# EAGLE board diplexer_v4rev0-layout (EAGLE 6.1)
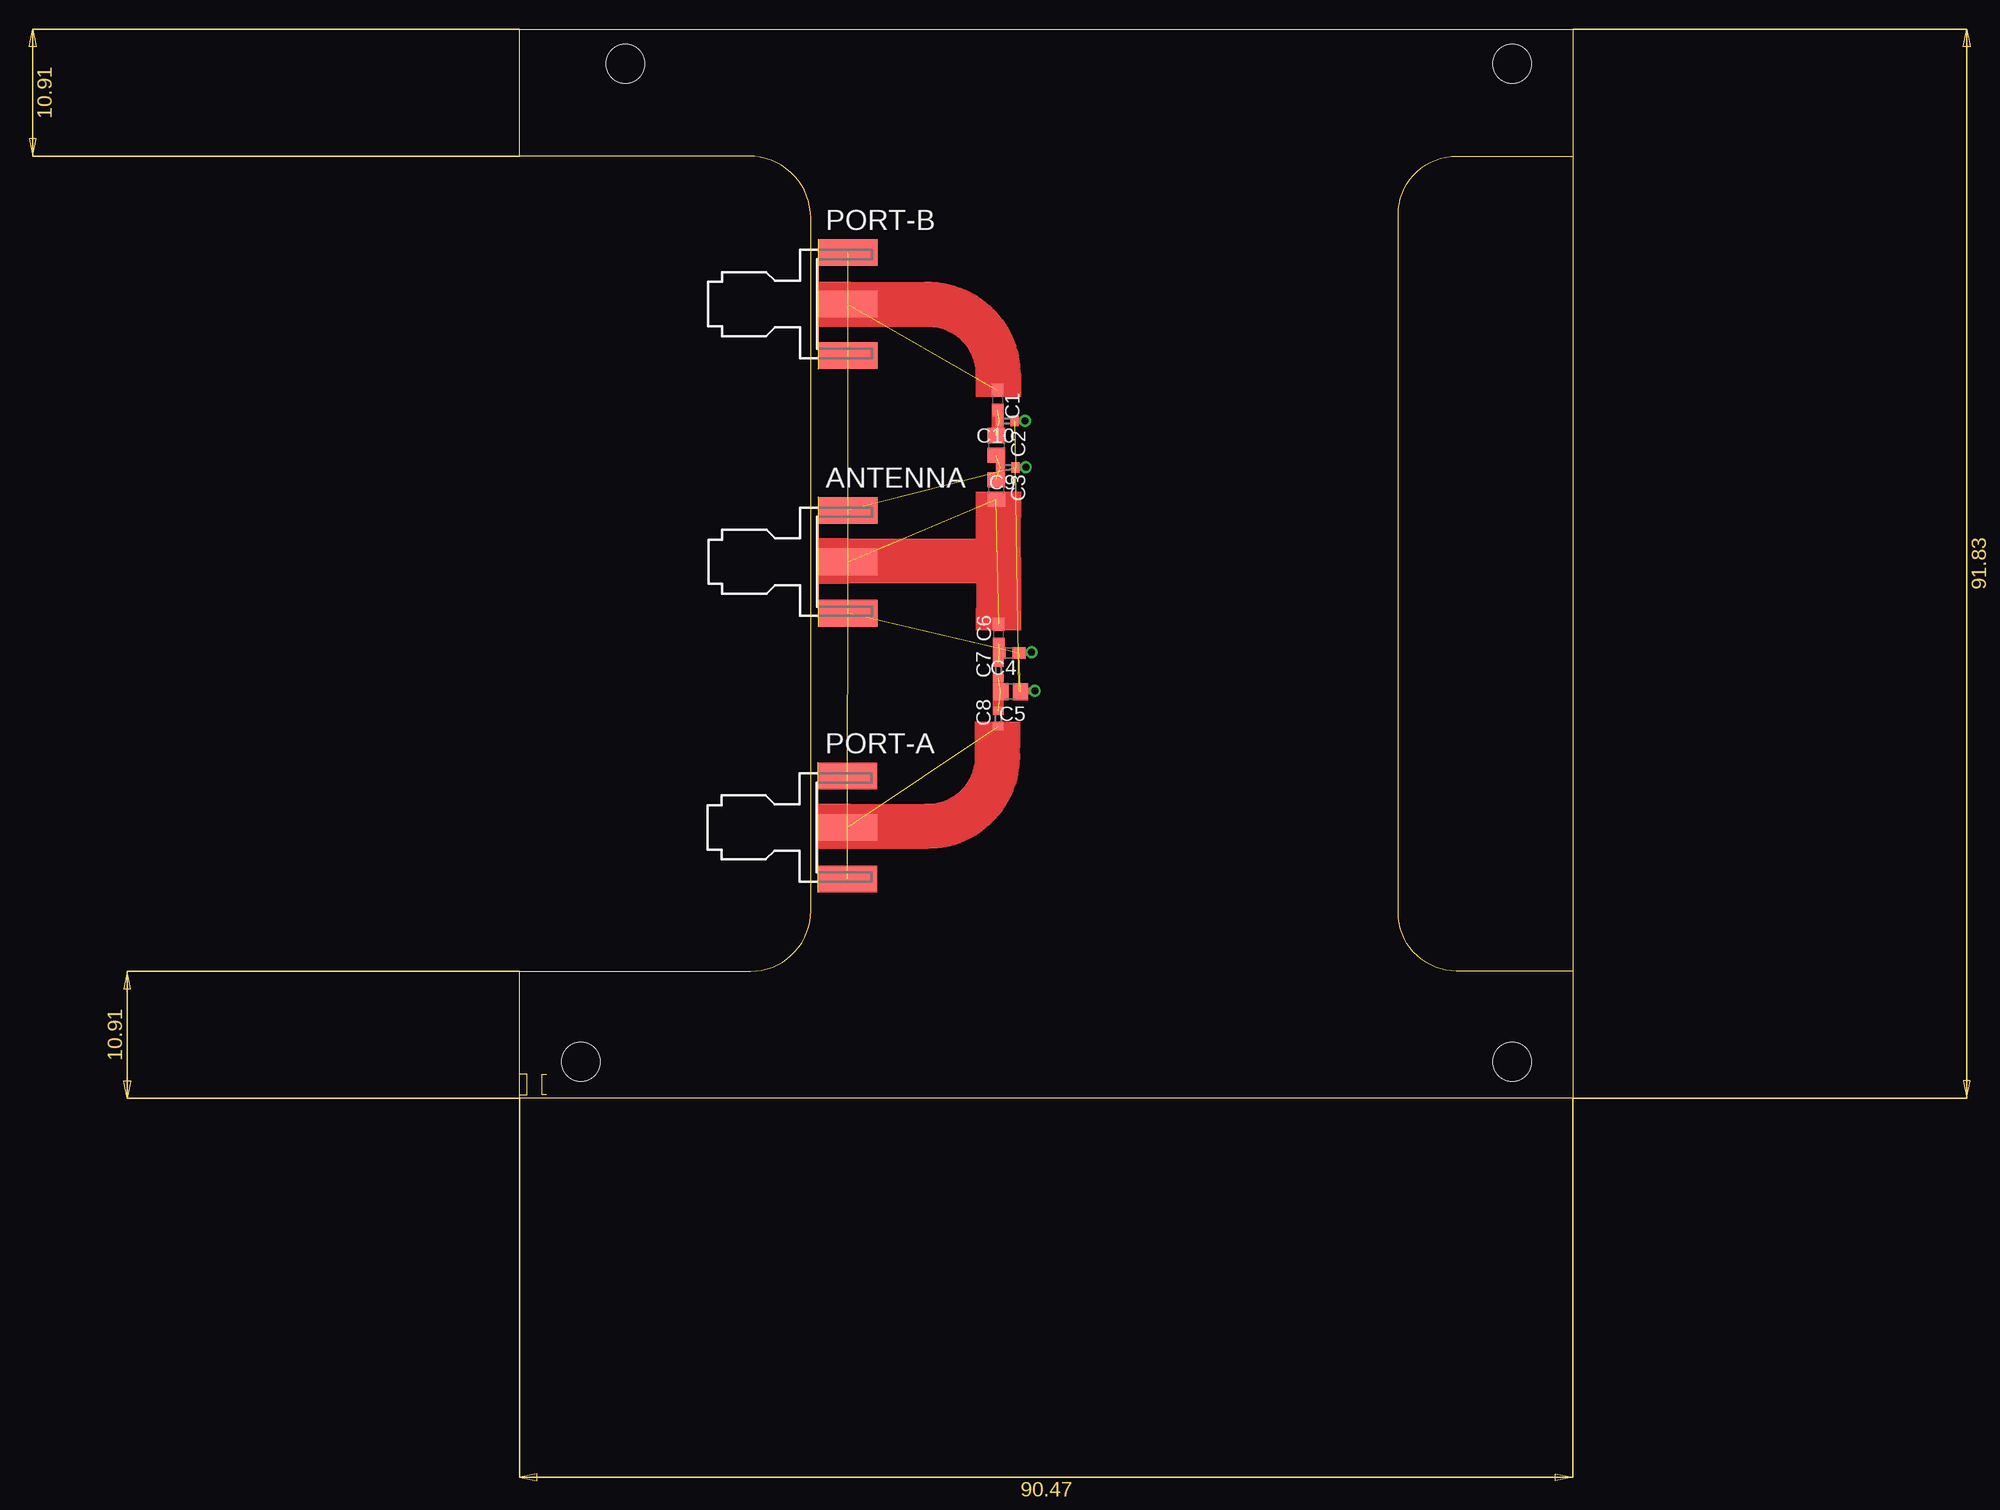
[diagram p0: board, top side]
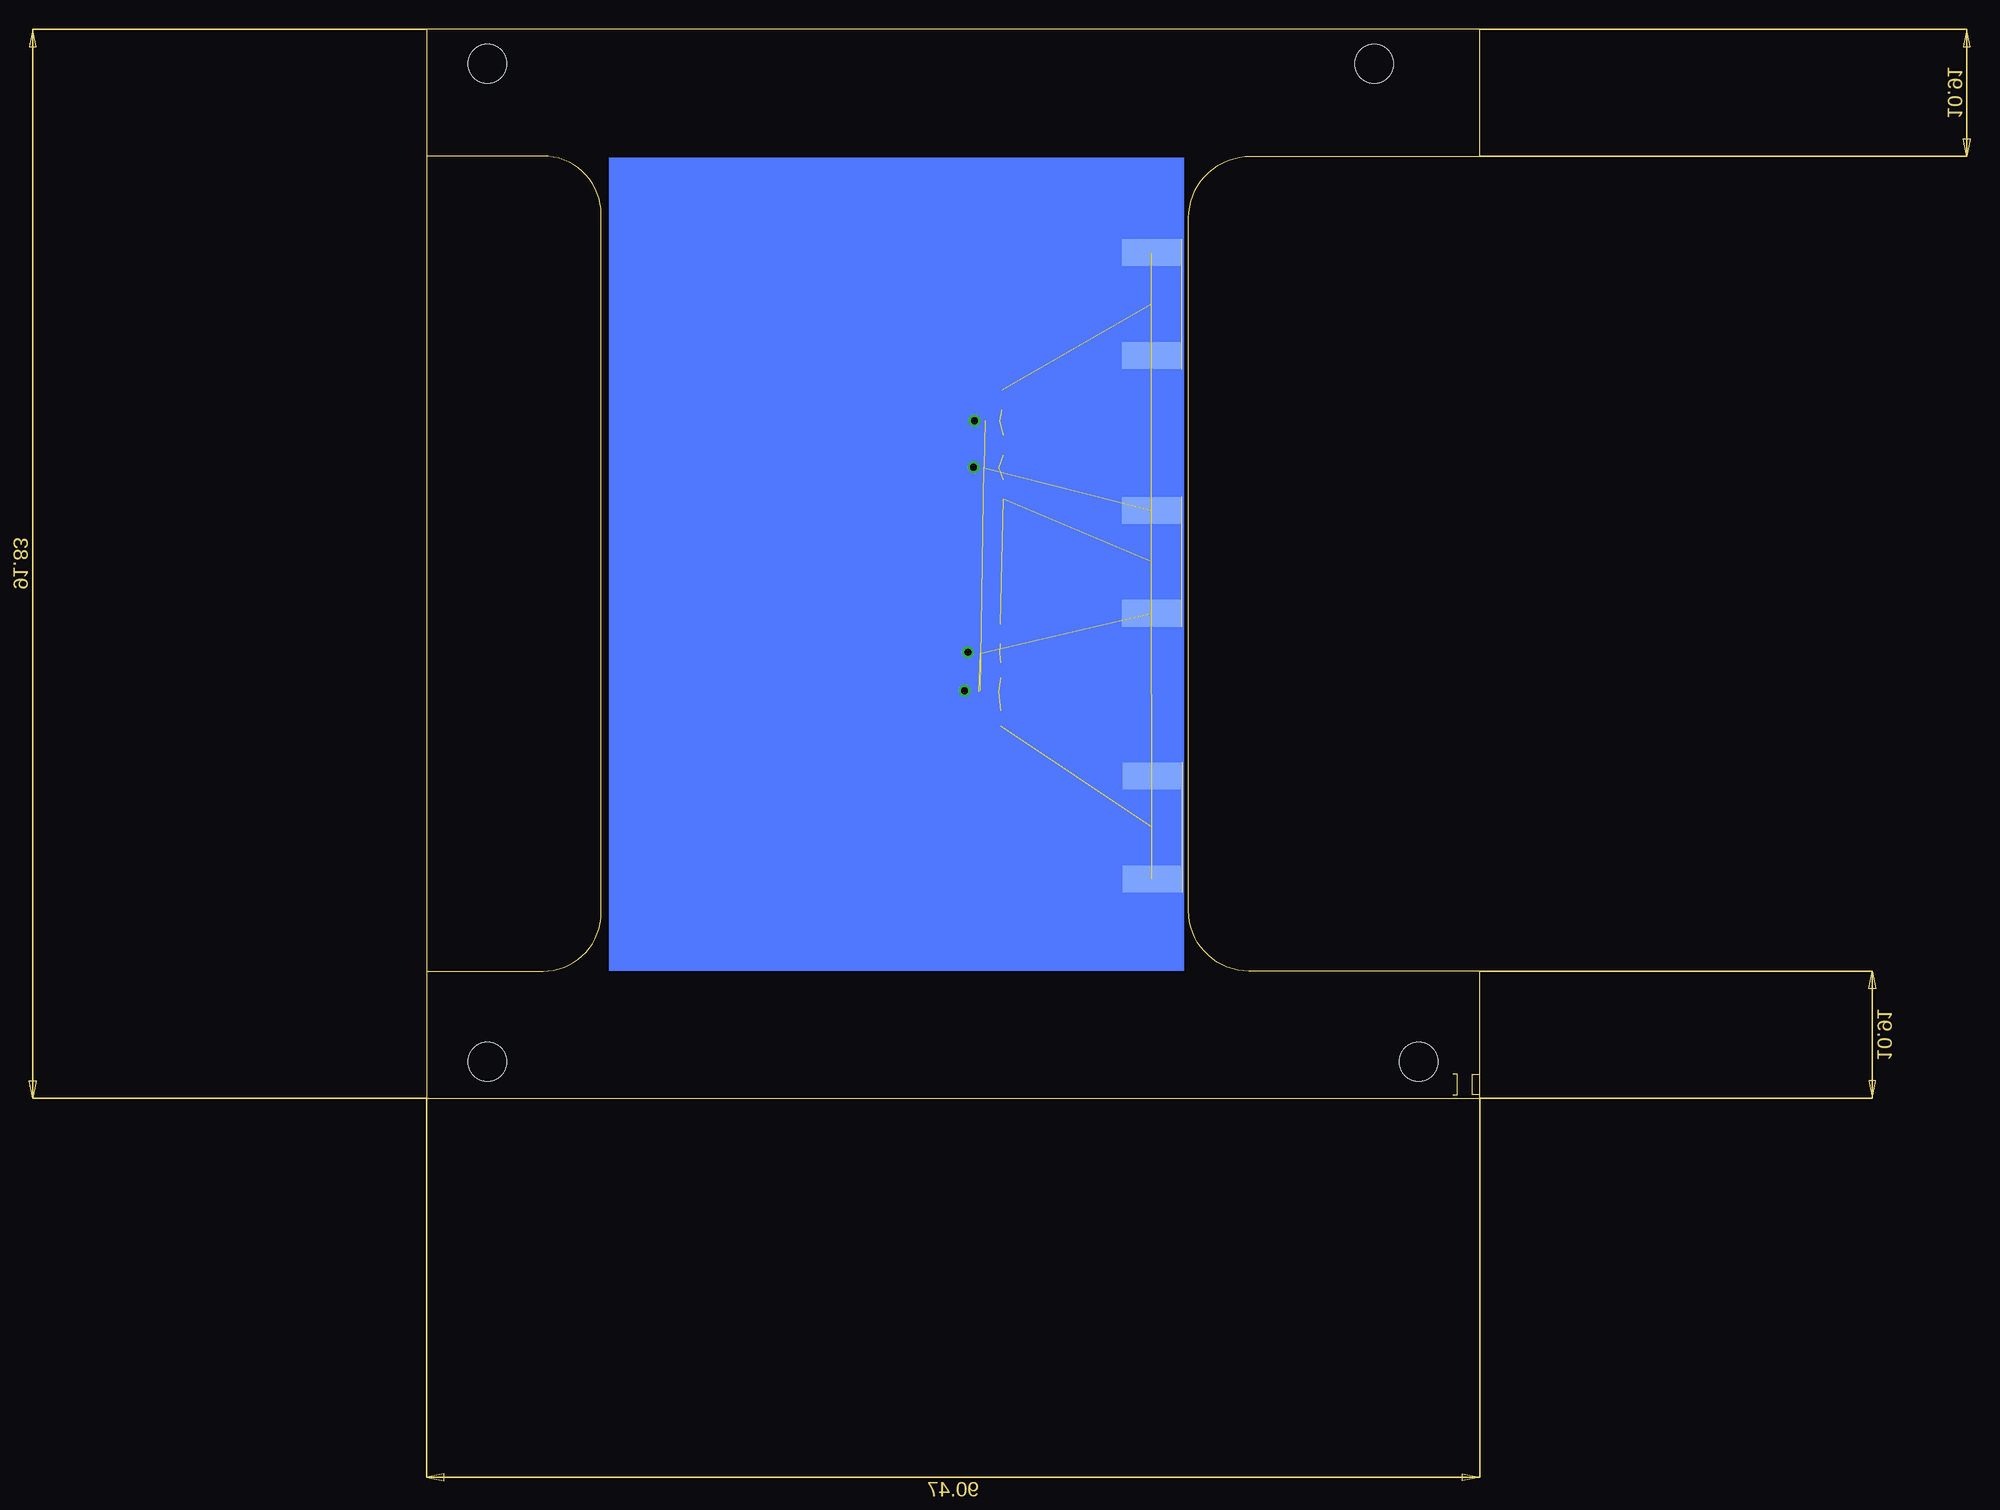
[diagram p1: board, bottom side, seen from below]

Size 90.47 x 91.83 mm. Coordinates in mm from the lower left corner, seen from the top.
Outline: 90.47,80.91 90.47,91.83 0,91.83 0,80.91 19.68,80.91 arc-90 25,75.59 25,16.08 arc-90 19.83,10.91 0,10.91 0,2.06
Outline: 90.47,80.91 90.47,10.91
Outline: 90.47,10.91 90.47,0 0,0 0,0.28
Outline: 0,0.28 0,2.06
Outline: 0,0.28 0.64,0.28 0.64,2.06 0,2.06
Outline: 2.3,0.28 1.92,0.28 1.92,2.06 2.3,2.06
Outline: 90.47,10.91 80.47,10.91 arc-90 75.47,15.91 75.47,75.91 arc-90 80.47,80.91 90.47,80.91
Copper layers (1*16): Top 0.035mm / dielectric 1.5mm / Bottom 0.035mm
Design rules: minimum track width 10mil, minimum drill 24mil, track to track 8mil, track to pad 8mil, pad to pad 8mil, via to via 8mil, smd to smd 8mil, copper to edge 40mil, drill to drill 8mil, minimum pad ring 10mil, minimum via ring 8mil, stop-mask expansion 4mil, vias tented up to drill 0mil, thermal gap 10mil
Holes 3.3 mm at 5.26,3.13 85.27,3.13 9.07,88.85 85.27,88.85

## Footprints (pad centres in the part's own frame; a part is rotated, then mirrored left to right if it is on the bottom)
J502-ND-142-0701-801/806 = smd 5.08 x 2.286: 1 2.565,0; G@1 2.565,4.42; G@2 2.565,-4.42 | smd 5.08 x 2.286 bottom: G@3 2.565,4.42; G@4 2.565,-4.42
C1608 = smd 1.1 x 1: 1 -0.85,0; 2 0.85,0
C2012 = smd 1.3 x 1.5: 1 -0.85,0; 2 0.85,0
C1005 = smd 0.7 x 0.9: 1 -0.65,0; 2 0.65,0

## Placement (x,y rotation side)
ANTENNA  SMA-142-0701-801/806  [J502-ND-142-0701-801/806]  25.63,46.07 0 top
C1  20pF  [C1608]  41.05,59.96 270 top
C2  5pF  [C2012]  40.92,56.07 270 top
C3  5pF  [C2012]  40.91,52.28 270 top
C4  20pF  [C1608]  42.04,38.23 180 top
C5  8pF  [C2012]  42.16,34.91 180 top
C6  82nH  [C1608]  41.15,39.87 90 top
C7  75nH  [C1005]  41.11,36.75 90 top
C8  17nH  [C1005]  41.11,32.62 90 top
C9  19nH  [C1005]  41.94,54.17 180 top
C10  40nH  [C1005]  41.84,58.17 180 top
PORT-A  SMA-142-0701-801/806  [J502-ND-142-0701-801/806]  25.57,23.25 0 top
PORT-B  SMA-142-0701-801/806  [J502-ND-142-0701-801/806]  25.62,68.21 0 top

## Library data of the parts
ANTENNA PORT-A PORT-B = con-coax; MF: JOHNSON COMPONENTS; MPN: 142-0701-801; OC_FARNELL: 1608592; OC_NEWARK: 90F2624
C1-C10 = rcl

## Nets
GND: ANTENNA.G@1 ANTENNA.G@2 ANTENNA.G@3 ANTENNA.G@4 C4.1 C5.1 C9.1 C10.1 PORT-A.G@1 PORT-A.G@2 PORT-A.G@3 PORT-A.G@4 PORT-B.G@1 PORT-B.G@2 PORT-B.G@3 PORT-B.G@4
N$2: C8.1 PORT-A.1
N$3: C5.2 C7.1 C8.2
N$4: C4.2 C6.1 C7.2
N$5: C1.1 PORT-B.1
N$6: ANTENNA.1 C3.2 C6.2
N$7: C2.2 C3.1 C9.2
N$8: C1.2 C2.1 C10.2

## Tracks (layer width: path | path; a pad name or v marks a point on that pad's centre or on a via)
GND  (15 unrouted)
GND1  (via drill 0.6)  (1 unrouted)
  Top 0.61: 42.51,58.2 42.46,58.18 v43.39,58.18 | v43.47,54.19 42.57,54.19 42.6,54.2 | 42.88,35 44.26,35
  Bottom 0.61: v43.39,58.18 43.41,57.13 v43.47,54.19
N$1
  Top 3.868: 28.15,68.19 35.08,68.19
  Top 3.87: 35.08,68.19 arc-90 41.08,62.19 41.08,62.28
N$2  (1 unrouted)
N$3  (2 unrouted)
N$4  (2 unrouted)
N$5  (1 unrouted)
N$6  (2 unrouted)
N$7  (2 unrouted)
N$8  (2 unrouted)
N$9
  Top 3.87: 28.12,23.36 35.05,23.36 arc90 41.05,29.36 41.05,30.36
N$10  (via drill 0.6)
  Top 0.61: 42.91,38.3 42.86,38.3 v43.97,38.3
  Bottom 0.61: v43.97,38.3 43.83,38.04 v44.24,35
N$11
  Top 3.87: 28.2,46.14 41.13,46.14 | 41.13,46.14 41.13,50.14 | 41.13,46.14 41.13,42.14
(copper drawn outside any net)
  shapes: Bottom area x2, Top area x12